# Altium PCB PCB1.PcbDoc
Units mm, origin at the board's own origin, x right, y up, seen from the top; angles counter-clockwise.
Board outline 133.73 x 69.22 mm, 2 copper layers (Top Layer, Bottom Layer); 53 components, 38 nets, 196 pads, 46 vias.
Unrouted connection lines stored in the file: 1.
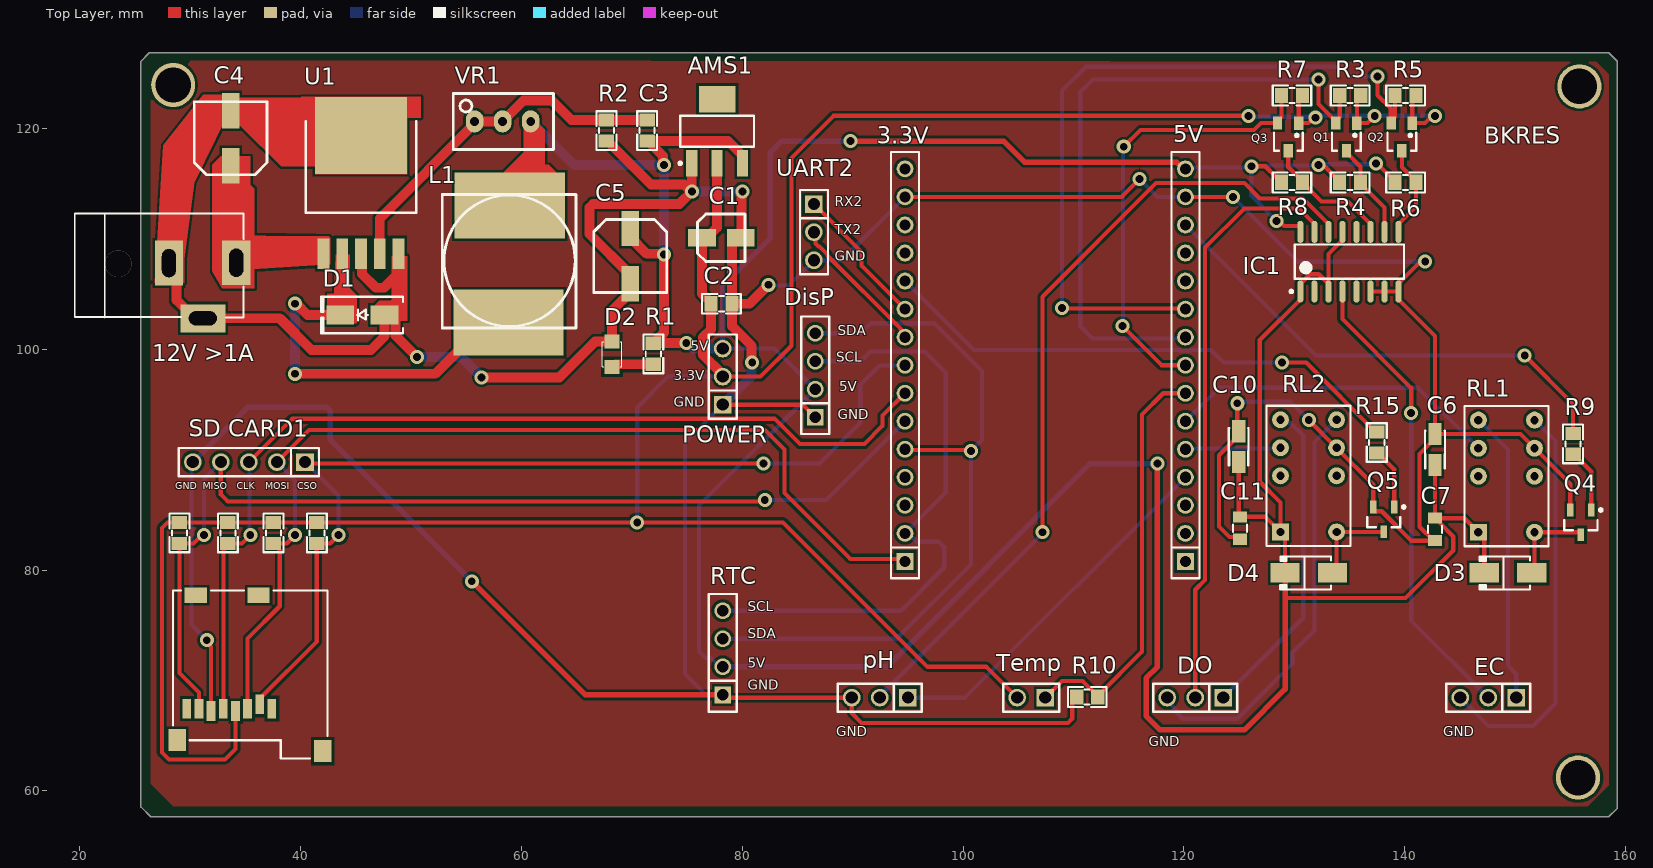
[diagram p0: Top Layer view]
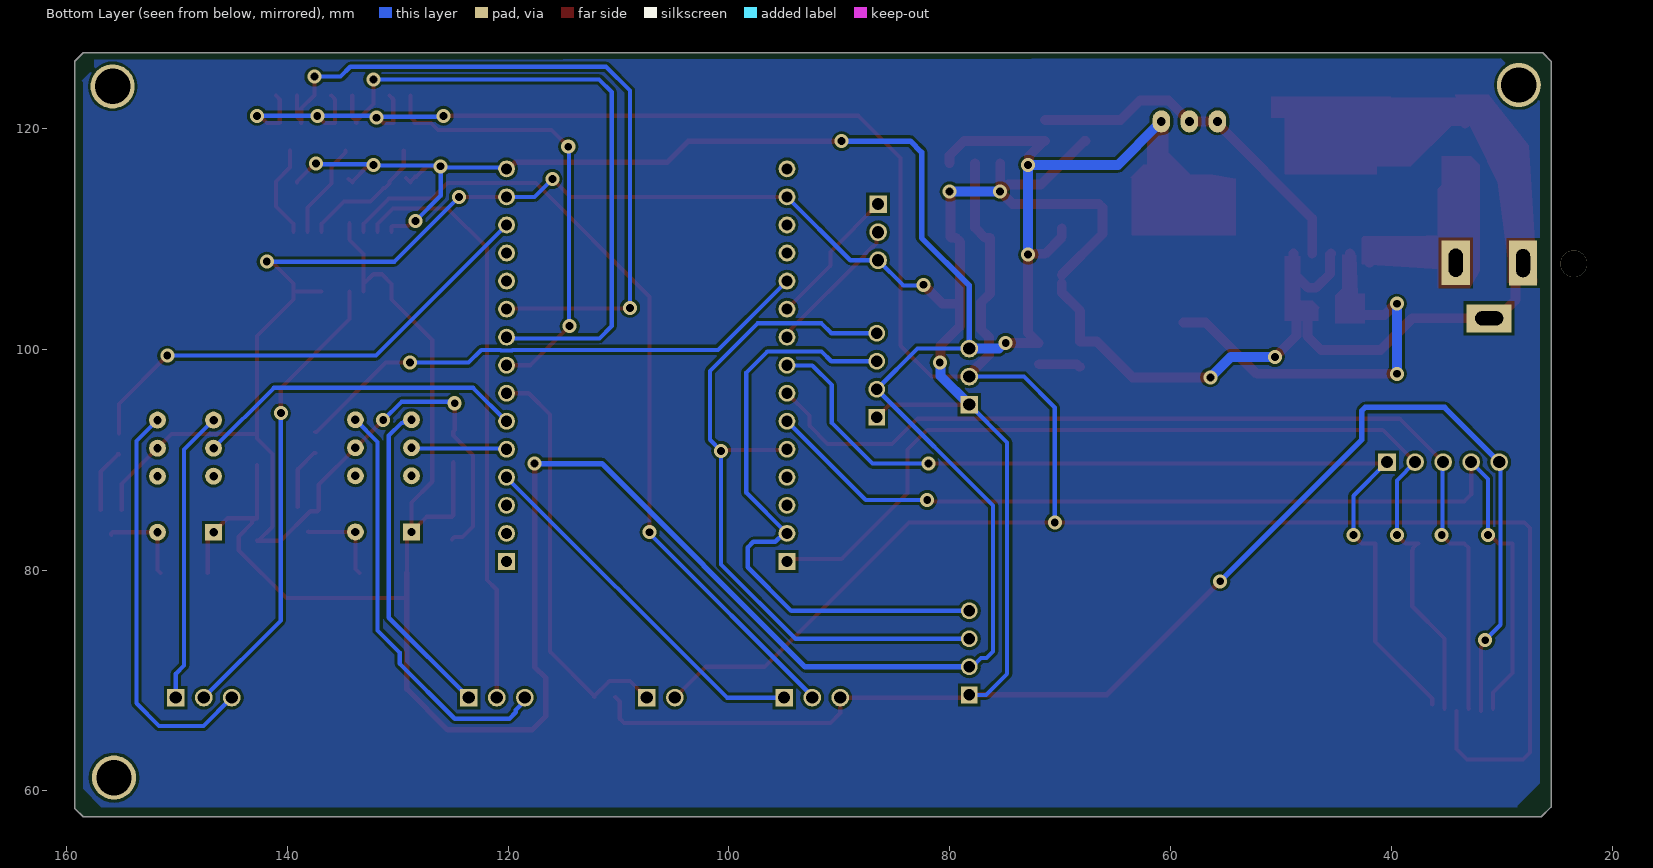
[diagram p1: Bottom Layer view, seen from below]
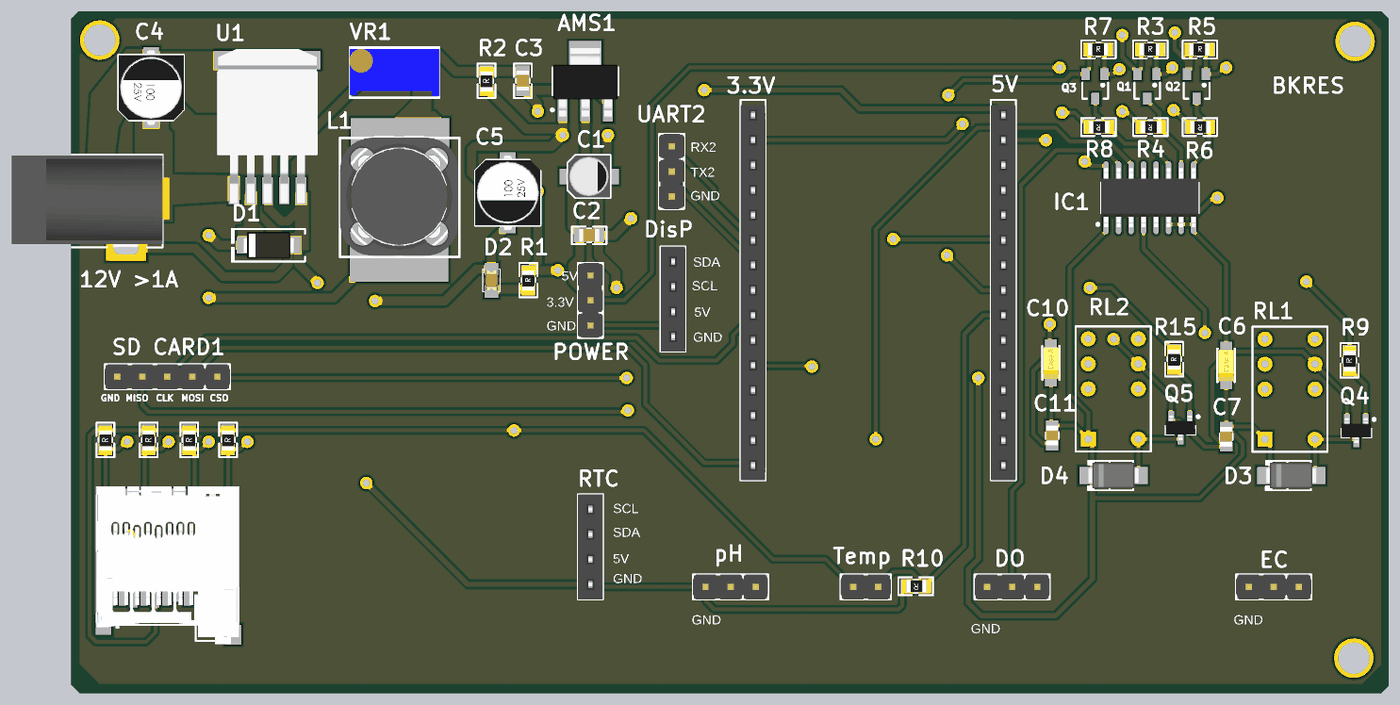
[diagram p2: 3D render of the assembled board from above, using the file's embedded part models]

## Layer stack, top to bottom
Top Solder: solder mask 0.0102, Solder Resist, Dk 3.5
Top Layer: signal copper 0.0356
Dielectric 1: dielectric 0.32, FR-4, Dk 4.8
Bottom Layer: signal copper 0.0356
Bottom Solder: solder mask 0.0102, Solder Resist, Dk 3.5

## Board outline
26.289,126.873 25.527,126.111 25.527,58.547 26.416,57.658 158.496,57.658 159.258,58.42 159.258,126.111 158.496,126.873

## Design rules (kind name [scope] priority, off if disabled: settings)
Clearance [All] p1: gap=0.254 ignorepadtopadclearanceinfootprint=FALSE except(0: Arc-Hole Track-Hole SMDPad-Hole THPad-Hole Via-Hole Fill-Hole Poly-Hole Region-Hole Text-Hole)
PolygonConnect [All] p1: connectstyle=Relief reliefconductorwidth=0.254 reliefentries=4 polygonreliefangle="90 Angle" airgapwidth=0.254
RoutingVias [All] p1: holewidth=0.711 width=1.27 viastyle="Through Hole" minholewidth=0.711 minwidth=1.27 maxholewidth=0.711 maxwidth=1.27
SolderMaskExpansion [All] p1: expansion=0.102 istentingtop=FALSE
Width [All] p1: maxlimit=1 minlimit=0.254 preferedwidth=0.5
30 further rules are at their usual default settings.

## Components (designator, comment, footprint, x,y, rotation, side; value= is the part's Value field where it differs from the comment)
3.3V "JP15" JP15-C1T 94.742,80.793 r90 top (schematic designator C8)
5V "JP15" JP15-C1T 120.142,80.793 r90 top (schematic designator C9)
"12V >1A" "Jac DC" DC-IN 34.163,107.848 r0 top (schematic designator JDC1)
AMS1 "AMS1117-3.3V" SOT223 77.724,119.761 r0 top value="AMS1117-3.3V SOT223"
C1 "1uF" "tu nhom 4 (B)" 78.105,110.109 r0 top
C2 "104" "tu 0805" 78.105,104.14 r0 top
C3 "33pF" "tu 0805" 71.374,119.82 r90 top
C4 "220uF" "tu nhom 6.3 (d)" 33.655,119.126 r90 top
C5 "220uF" "tu nhom 6.3 (d)" 69.85,108.458 r270 top
C6 "C-P" CT1206 142.748,90.932 r90 top value=10u
C7 "C-N" CC0805L 142.748,83.693 r90 top value=100n
C10 "C-P" CT1206 124.968,91.186 r90 top value=10u
C11 "C-N" CC0805L 125.095,83.82 r90 top value=100n
CLK "1k" "tro smd 0805" 33.34,83.374 r90 top (schematic designator R13)
CSO "1k" "tro smd 0805" 41.402,83.374 r90 top (schematic designator R11)
D1 "SS14" "DIODE SMA" 45.593,103.124 r180 top
D2 "LED" LED-0805-Red 68.199,98.425 r90 top
D3 "D Schottky" DO-214AC 149.352,79.756 r180 top
D4 "D Schottky" DO-214AC 131.318,79.756 r180 top
DisP "DisP" "JP 1x4 CT" 86.614,93.853 r90 top (schematic designator JP1)
DO "DO" "JP 1x3 DT" 123.571,68.453 r180 top (schematic designator JP3)
EC "EC" "JP 1x3 DT" 150.114,68.453 r180 top (schematic designator JP2)
GND "MicroSD Card" "MicroSD Card" 42.425,78.154 r180 top (schematic designator CN1)
IC1 "4053" SO16 135.001,107.95 r90 top value=CD4053
L1 "100uH - 3A SMD" "Cuon Cam 12x12x10" 64.928,114.03 r180 top
MISO "1k" "tro smd 0805" 28.956,83.374 r90 top (schematic designator R14)
MOSI "1k" "tro smd 0805" 37.465,83.374 r90 top (schematic designator R12)
pH "pH" "JP 1x3 DT" 94.996,68.453 r180 top (schematic designator pH1)
POWER "SIM_UART" "JP 1x3 DT" 78.232,94.996 r90 top (schematic designator P)
Q1 "DMN2075U-7" SOT23 134.737,119.253 r180 top
Q2 "DMN2075U-7" SOT23 139.755,119.253 r180 top
Q3 "DMN2075U-7" SOT23 129.468,119.253 r180 top
Q4 "C1815" SOT-23 155.956,84.328 r180 top
Q5 "C1815" SOT-23 138.11,84.6 r180 top
R1 "10k" "tro smd 0805" 71.882,99.598 r90 top
R2 "510k" "tro smd 0805" 67.63,119.823 r90 top
R3 "10k" "tro smd 0805" 135.063,123.063 r0 top
R4 "10k" "tro smd 0805" 135.063,115.062 r180 top
R5 "10k" "tro smd 0805" 140.081,123.063 r0 top
R6 "10k" "tro smd 0805" 140.081,115.062 r180 top
R7 "10k" "tro smd 0805" 129.794,123.063 r0 top
R8 "10k" "tro smd 0805" 129.794,115.062 r180 top
R9 "1k" "tro smd 0805" 155.194,91.44 r90 top
R10 "10k" "tro smd 0805" 111.252,68.453 r180 top
R15 "1k" "tro smd 0805" 137.414,91.567 r90 top
RL1 "RL-G6S-2" RL_G6S-2 151.765,83.439 r180 top
RL2 "RL-G6S-2" RL_G6S-2 133.833,83.464 r180 top
RTC "RTC" "JP 1x4 CT" 78.232,68.707 r90 top (schematic designator JP4)
"SD CARD1" "JP 1x5 2.54" "JP 1x5 DT" 40.386,89.789 r180 top
Temp "JP 1x2 2.54" "JP 1x2 DT" 107.442,68.453 r180 top (schematic designator TEMP1)
U1 "LM2596_ADJ" TO263-5 45.466,108.68 r0 top
UART2 "SIM_UART" "JP 1x3 DT" 86.487,113.157 r270 top (schematic designator SIM_UART1)
VR1 "1K" "Bien Tro Vi Chinh Dung" 58.293,120.65 r0 top

## Footprints (in the part's own frame and the unit in brackets; to place one, negate y for a bottom-side part, rotate by r counter-clockwise, add the part's x,y. Pads: shape width x height; smd on the part's side, far side on the other; paste and mask are expansions set on the pad)
"Bien Tro Vi Chinh Dung" [mm] "Bien tro vi chinh"
  oval 1.6x2 hole 0.8: 1(-2.54,0) 2(0,0) 3(2.54,0)
  silkscreen extent -4.47,-2.54 4.6,2.54, body extent -4.54,-2.4 4.66,2.4, height 12.02
CC0805L [mm] "Chip Resistor, Body 2.0x1.3mm, IPC Medium Density"
  rect 1x1.27 smd: 1(-1.016,0) 2(1.016,0)
  silkscreen extent -0.33,-0.64 0.33,0.64, body extent -1,-0.62 1,0.63, height 1
CT1206 [mm] "Capacitor, SM Tantalum; Body 3.2 x 1.6 mm (LxW typ)"
  rect 2x1.2 smd: 1(-1.4,0) 2(1.4,0)
  silkscreen extent -1.7,-0.9 1.7,0.9, body extent -1.6,-0.8 1.6,0.8, height 1.6
"Cuon Cam 12x12x10" [mm] "Cuon Cam 12x12x10"
  rect 10x6 smd: 1(6.1,11.6) 2(6,1)
  silkscreen extent 0,0 12.1,12.1, body extent 0.1,-0.2 12.1,12.14, height 7.51
DC-IN [mil] "Jac DC input"
  rect 100x160 hole 50 slot 100 at 90 deg: 1(0,0) 2(-240,-1)
  rect 160x100 hole 50 slot 100 at 0 deg: 3(-119,-198)
  silkscreen extent -576,-195 26,176, body extent -576,-195 26,173, height 434
"DIODE SMA" [mm] "SMA"
  rect 2.5x1.7 smd: 1(-2,0) 2(2,0)
  silkscreen extent -3.68,-1.65 3.75,1.65, body extent -2.6,-1.37 2.6,1.37, height 2.4
DO-214AC [mm]
  rect 2.65x1.75 smd: 1(-2.15,0) 2(2.15,0)
  silkscreen extent -2,-1.5 2.59,1.5, body extent -2.6,-1.3 2.6,1.3, height 2.4
JP15-C1T [mm] "15 row, straight, gold plating"
  rect 1.52x1.52 hole 1.02: 1(0,0)
  round 1.52 hole 1.02: 2(2.54,0) 3(5.08,0) 4(7.62,0) 5(10.16,0) 6(12.7,0) 7(15.24,0) 8(17.78,0) 9(20.32,0) 10(22.86,0) 11(25.4,0) 12(27.94,0) 13(30.48,0) 14(33.02,0) 15(35.56,0)
  silkscreen extent -1.52,-1.27 37.08,1.27, body extent -1.52,-1.25 36.58,1.25, height 8.51
"JP 1x2 DT" [mm] "2 pins, 1 row, straight, gold plating"
  rect 1.6x1.6 hole 1.1: 1(0,0)
  round 1.6 hole 1.1: 2(2.54,0)
  silkscreen extent -1.27,-1.27 3.81,1.27, body extent -1.27,-1.27 3.81,1.27, height 8.54
"JP 1x3 DT" [mm]
  rect 1.6x1.6 hole 1.1: 1(0,0)
  round 1.6 hole 1.1: 2(2.54,0) 3(5.08,0)
  silkscreen extent -1.27,-1.27 6.35,1.27, body extent -1.27,-1.27 6.35,1.27, height 8.54
"JP 1x4 CT" [mm]
  rect 1.52x1.52 hole 1.02: 1(0,0)
  round 1.52 hole 1.02: 2(2.54,0) 3(5.08,0) 4(7.62,0)
  silkscreen extent -1.52,-1.27 9.14,1.27, body extent -1.52,-1.25 9.14,1.25, height 8.51
"JP 1x5 DT" [mm] "5 pins, 1 row, straight, gold plating"
  rect 1.6x1.6 hole 1.1: 1(0,0)
  round 1.6 hole 1.1: 2(2.54,0) 3(5.08,0) 4(7.62,0) 5(10.16,0)
  silkscreen extent -1.27,-1.27 11.43,1.27, body extent -1.27,-1.27 11.43,1.27, height 8.54
LED-0805-Red [mil]
  rect 50x55 smd: 1(0,0) 2(90,0)
  silkscreen extent 0,-35 90,35, body extent 5,-25 85,25, height 43
"MicroSD Card" [mm] "Connector; SD Card Type A, SM, 9 Position, Right Angle, Pitch 2.5 mm, Body 23.3 x 27.4 x 3.4 mm (LxWxH)"
  rect 0.8x1.8 smd: 1(5.04,10.7) 2(6.14,10.3) 3(7.24,10.7) 4(8.34,10.9) 5(9.44,10.7) 6(10.54,10.9) 7(11.64,10.7) 8(12.74,10.7)
  rect 1.6x2 smd: MH1(0.43,14.55) MH2(13.6,13.55)
  rect 2x1.4 smd: MH3(11.93,0.43) MH4(6.23,0.43)
  silkscreen extent 0,0 13.98,15.2, body extent -0.21,-0.49 14.39,15.51, height 1.72
RL_G6S-2 [mil]
  rect 60x60 hole 30: 1(200,0)
  round 60 hole 30: 3(200,-200) 4(200,-300) 5(200,-400) 8(0,-400) 9(0,-300) 10(0,-200) 12(0,0)
  silkscreen extent -50,-450 250,50
SO16 [mm] "SOIC, 16-Leads, Body 9.90x3.91mm, Pitch 1.27mm, IPC Medium Density"
  oval 2x0.55 smd: 1(-2.7,4.445) 2(-2.7,3.175) 3(-2.7,1.905) 4(-2.7,0.635) 5(-2.7,-0.635) 6(-2.7,-1.905) 7(-2.7,-3.175) 8(-2.7,-4.445) 9(2.7,-4.445) 10(2.7,-3.175) 11(2.7,-1.905) 12(2.7,-0.635) 13(2.7,0.635) 14(2.7,1.905) 15(2.7,3.175) 16(2.7,4.445)
  silkscreen extent -2.82,-4.95 1.55,5.39, body extent -3,-4.95 3,4.95, height 1.4
SOT23 [mm] "SOT 23 _ 1-3-2"
  rect 0.85x1.2 smd: 1(-0.94,-1.245) 2(0.985,-1.25) 3(0.005,1.25)
  silkscreen extent -1.29,-0.38 1.31,1.25, body extent -1.5,-1.5 1.52,1.5, height 1.27
SOT223 [mm]
  rect 1x2.4 smd: 1(-2.3,-2.9) 2(0,-2.9) 3(2.3,-2.9)
  rect 3.3x2.4 smd: 4(0,2.9)
  silkscreen extent -3.47,-3.02 3.35,1.4, body extent -3.25,-3.56 3.25,3.4, height 1.68
SOT-23 [mm] "SOT-23; 3 Leads; Body 3.1 x 2.5 mm, inc. leads (LxW max)"
  rect 0.6x1.15 smd: 1(-0.95,-1.125) 2(0.95,-1.125) 3(0,1.125)
  silkscreen extent -1.93,-1.25 1.5,0.7, body extent -1.5,-1.25 1.5,1.25, height 1.06
TO263-5 [mm] "LM2576-SMD"
  rect 1.07x2.75 smd: 1(-3.4,0) 2(-1.7,0) 3(0,0) 4(1.7,0) 5(3.4,0)
  rect 8.33x6.99 smd: 6(0,10.7)
  Top Layer region: -5.4,14.195 -5.4,12.295 -4.165,12.295 -4.165,7.205 4.165,7.205 4.165,12.295 5.4,12.295 5.4,14.195
  silkscreen extent -5,3.7 5,12, body extent -5,-1.29 5,14.38, height 4.79
"tro smd 0805" [mm]
  rect 1.2x1.4 smd: 1(-0.946,-0.061) 2(0.954,-0.061)
  silkscreen extent -1.75,-0.97 1.75,0.84, body extent -1.56,-0.76 1.44,0.64, height 0.53
"tu 0805" [mm] "Compoment SMD 80x50mil"
  rect 1.2x1.4 smd: 1(-0.946,-0.003) 2(0.954,-0.003)
  silkscreen extent -1.75,-0.89 1.75,0.89, body extent -1.01,-0.64 1.01,0.63, height 0.61
"tu nhom 4 (B)" [mm]
  rect 2.5x1.6 smd: 1(-1.75,0) 2(1.75,0)
  silkscreen extent -2.15,-2.15 2.15,2.15, body extent -2.31,-2.15 2.29,2.15, height 3.91
"tu nhom 6.3 (d)" [mm]
  rect 3.2x1.6 smd: 1(-2.5,0) 2(2.5,0)
  silkscreen extent -3.3,-3.3 3.3,3.3, body extent -3.8,-3.3 3.8,3.3, height 8

## Part data
3.3V 5V: "WR-PHD 2.54 mm Angled Socket Header", Manufacturer="W¨¹rth Elektronik eiSos GmbH", partNo=613015143121, ComponentLink1 Description=Manufacturer, ComponentLink1URL=http://www.we-online.com, ComponentLink2 Description=Datasheet, ComponentLink2URL=http://katalog.we-online.de/em/datasheet/6130xx143121.pdf, Created by="Karrer Zheng", Created Date="29 March 2013", NoPins=15
"12V >1A": library part DCIN, "Jac DC input"
AMS1: library part "AMS1117 SMD", "Dán", Chung_Loai=Dán, Don_Vi=Con, Ma_Hang=MH000596
C1: library part "Tu Nhom 1uF 50V", "Dán", Chung_Loai=Dán, Don_Vi=Con, Ma_Hang=MH007467, So_Chan=2, Ten_Linh_Kien="Tụ Nhôm 1uF 50V 4x5.4MM"
C2: library part "Tu 0805 104 50V 10%", "Dán", Chung_Loai=Dán, Don_Vi=Con, Ma_Hang=MH004551, So_Chan=2, Ten_Linh_Kien="Tụ 0805 104-100nF 10% 50V"
C3: library part "Tu 0805 33pF 50V 10%", "Dán", Chung_Loai=Dán, Don_Vi=Con, Ma_Hang=MH004563, So_Chan=2, Ten_Linh_Kien="Tụ 0805 33p 10% 50V"
C4 C5: library part "Tu Nhom 220uF 16V", "Dán", Chung_Loai=Dán, Don_Vi=Con, Ma_Hang=MH002227, So_Chan=2, Ten_Linh_Kien="Tụ Nhôm 220uF 16V 6.3x7.7MM"
C6 C10: "Polar Capacitor"
C7 C11: "Non-Polar Capacitor"
CLK CSO MISO MOSI R3 R4 R5 R6 R7 R8 R9 R15: library part "Tro 0805 1% 1k", "Dán", Chung_Loai=Dán, Don_Vi=Con, Ma_Hang=MH005468, So_Chan=2, Ten_Linh_Kien="Trở 0805 1% 1k"
D1: library part "Diode SS14 ( 1N5819)", "Dán", Chung_Loai=Dán, Don_Vi=Con, Ma_Hang=MH002211, Ten_Linh_Kien="Diode SS14 DO214 Schottky 1A 40V ( 1N5819 DO214)"
D2: "Typical INFRARED GaAs LED", LatestRevisionDate=08-Jul-2005, LatestRevisionNote="Mech Layer 1 removed.", PackageReference=LED-0, Published=8-Jun-2000, Publisher="Altium Limited"
D3 D4: "Schottky Diode"
DisP RTC: library part "JP 1x4 2.54 Cai Thang", "Cắm", Chung_Loai=Cắm, Don_Vi=Con, Ma_Hang=MH004006, Ten_Linh_Kien="Jump Đơn Cái 2.54MM 1x20P Thẳng"
DO EC pH POWER UART2: library part "JP 1x3 2.54 Duc Thang", "Cắm", Chung_Loai=Cắm, Don_Vi=Con, Ma_Hang=MH000903, Ten_Linh_Kien="Jump Đơn Đực 2.54MM 1x40P Thẳng 11MM"
IC1: "Dual 4-channel analogue  multiplexer/demultiplexer"
L1: library part "CUON CAM 100uH SMD", "Dán", Chung_Loai=Dán, Don_Vi=Con, Ten_Linh_Kien="Cuộn Cảm 100uH 7x7x4MM CD74"
Q1 Q2 Q3: "MOSFET N-CH 20V 4.2A SOT23", LatestRevisionDate=17-Jul-2002, LatestRevisionNote="Re-released for DXP Platform.", PackageReference=E3, PackageVersion=1995/1996, Published=8-Jun-2000, Publisher="Altium Limited"
Q4 Q5: library part QC1815, "NPN G, 150mA, 150MHz"
R1 R10: library part "Tro 0805 1% 10k", "Dán", Chung_Loai=Dán, Don_Vi=Con, Ma_Hang=MH005473, So_Chan=2, Ten_Linh_Kien="Trở 0805 1% 10k"
R2: library part "Tro 0805 1% 510k", "Dán", Chung_Loai=Dán, Don_Vi=Con, Ma_Hang=MH005486, So_Chan=2, Ten_Linh_Kien="Trở 0805 1% 510k"
"SD CARD1": library part "JP 1x5 2.54 Duc Thang", "Cắm", Chung_Loai=Cắm, Don_Vi=Con, Ma_Hang=MH000903, Ten_Linh_Kien="Jump Đơn Đực 2.54MM 1x40P Thẳng 11MM"
Temp: library part "JP 1x2 2.54 Duc Thang", "Cắm", Chung_Loai=Cắm, Don_Vi=Con, Ma_Hang=MH000903, Ten_Linh_Kien="Jump Đơn Đực 2.54MM 1x40P Thẳng 11MM"
VR1: library part "Bien Tro Tinh Chinh 1K Dung", "Cắm", Chung_Loai=Cắm, Don_Vi=Con, Ma_Hang=MH003234, Ten_Linh_Kien="Biến Trở VR 102-1K 3296W"

## Free pads (board coordinates)
  round 4 hole 3.2: 3(28.448,123.952) 3(155.702,61.214) 3(155.829,123.825)

## Via types
v1: diameter 1.27, hole 0.711, Top Layer to Bottom Layer, 45 vias
v2: diameter 2.4, hole 2.4, Top Layer to Bottom Layer, 1 vias

## Nets (pads, with @x,y where several pads share a name; then routed paths per layer and width w, separated by ;. In a path a pad name is that pad's centre, name@x,y a point inside that pad or via, vN(x,y) a via of type N, cw(c..) or ccw(c..) an arc to the next point about the centre after c; other vN are vias at no path point)
3.3V: AMS1.2 AMS1.4 C1.1 C2.1 CLK.2 CSO.2 GND.4 MISO.2 MOSI.2 POWER.2 Q1.1 Q2.1 Q3.1 R3.2 R5.2 R7.2 Temp.2 | length 254.4
  Top Layer w0.381: GND.4 34.085,63.803 33.147,62.865 28.067,62.865 27.432,63.5 27.432,83.82 27.94,84.328 MISO.2 CLK.2 MOSI.2 CSO.2 v1(70.485,84.328) 83.693,84.328 96.774,71.247 102.108,71.247 Temp.2 ; POWER.2 81.661,97.536 84.455,100.33 84.455,117.348 88.265,121.158 v1(125.857,121.158) ; R7.2 130.408,122.662 Q3.1 131.278,120.498 131.771,120.99 v1(131.912,120.99) ; R3.2 135.676,122.662 Q1.1 136.627,120.498 v1(137.287,121.158) ; R5.2 140.695,122.662 Q2.1 141.847,120.498 142.507,121.158 v1(142.748,121.158)
  Top Layer w0.889: AMS1.2 77.724,111.028 76.805,110.109 C1.1 76.355,105.041 77.159,104.237 C2.1 77.159,101.809 76.454,101.103 76.454,99.506 78.232,97.728 POWER.2
  Bottom Layer w0.381: v1(70.485,84.328) 70.485,94.742 73.279,97.536 POWER.2 ; v1(125.857,121.158) 125.941,121.074 131.828,121.074 v1(131.912,120.99) ; v1@131.912,121.158 132.08,121.158 v1(137.287,121.158) v1(142.748,121.158)
5V: 5V.15 AMS1.3 C3.1 C5.1 C6.1 C7.2 C10.1 C11.2 D3.2 D4.2 DisP.2 IC1.1 IC1.3 IC1.13 IC1.16 L1.2 POWER.3 R1.2 R4.2 R6.2 R8.2 RL1.1 RL2.1 RTC.2 VR1.3 | length 373.6
  Top Layer w0.381: C10.1 124.968,84.963 C11.2 127.381,84.836 RL2.1 ; v1(126.111,116.586) 127.376,116.586 128.33,115.632 128.43,115.632 128.84,115.223 R8.2 R8.2@129.249,115.532 ; v1(128.397,111.633) 128.638,111.633 129.086,111.184 130.478,111.184 130.556,111.106 IC1.16 ; 129.168,77.47 140.081,77.47 144.399,81.788 144.399,83.058 143.192,84.265 143.192,84.399 C7.2@142.883,84.709 ; D4.2 129.168,83.049 RL2.1 ; v1(132.207,116.713) 132.377,116.543 132.788,116.543 134.108,115.223 R4.2 R4.2@134.433,115.447 ; IC1.3 IC1.3@133.096,105.929 ; IC1.13@134.366,111.421 IC1.13 134.366,109.925 133.096,108.655 IC1.3@133.096,105.929 ; v1(137.414,116.84) 137.509,116.84 139.127,115.223 R6.2 ; C6.1 C7.2 C7.2@142.883,84.709 ; D3.2 147.202,82.922 RL1.1 145.415,84.709 C7.2@142.883,84.709 ; RL2.1 128.753,86.131 126.873,88.011 126.873,100.842 130.556,104.525 130.556,105.929 131.434,106.807 132.218,106.807 IC1.3@133.096,105.929
  Top Layer w0.5: v1(89.789,118.872) 103.672,118.872 105.577,116.967 119.339,116.967 119.953,116.353 5V.15 ; v1(117.602,89.662) 117.602,71.247 116.586,70.231 116.586,66.802 117.856,65.532 125.476,65.532 129.168,69.224 129.168,77.47 D4.2
  Top Layer w0.889: L1.2 60.833,114.935 VR1.3 ; C5.1 69.85,110.158 71.35,108.658 72.825,108.658 v1(72.898,108.585) 72.898,101.507 72.198,100.808 72.198,100.708 R1.2@72.059,100.568 ; C3.1 C3.1@71.477,118.874 ; R1.2 71.959,100.568 R1.2@72.059,100.568 ; v1(72.898,116.713) 72.825,116.786 72.825,117.527 C3.1@71.477,118.874 ; v1(74.93,100.584) 74.914,100.568 R1.2@72.059,100.568 ; AMS1.3 80.024,117.561 78.711,118.874 C3.1@71.477,118.874
  Bottom Layer w0.381: RTC.2 77.964,71.247 77.156,72.054 76.663,72.054 76.073,72.644 76.073,85.852 DisP.2 82.931,100.076 POWER.3 ; 5V.15 120.258,116.47 125.995,116.47 v1(126.111,116.586) ; v1(128.397,111.633) 126.111,113.919 v1(126.111,116.586) ; v1(137.414,116.84) 137.35,116.776 132.27,116.776 v1(132.207,116.713) 132.143,116.649 126.174,116.649 v1(126.111,116.586)
  Bottom Layer w0.5: RTC.2 93.091,71.247 111.506,89.662 v1(117.602,89.662) ; POWER.3 78.232,105.791 82.55,110.109 82.55,117.856 83.566,118.872 v1(89.789,118.872)
  Bottom Layer w0.889: VR1.3 60.833,120.642 61.161,120.314 61.169,120.314 64.77,116.713 v1(72.898,116.713) v1(72.898,108.585) ; 75.541,100.076 POWER.3
CLK: 3.3V.7 "SD CARD1.3" CLK.1 GND.5 | length 88.6
  Top Layer w0.381: GND.5 33.02,67.489 33.02,82.047 CLK.1 34.673,82.428 35.429,83.185 v1(35.433,83.185) ; 35.306,89.789 39.243,93.726 82.931,93.726 85.217,91.44 91.059,91.44 92.71,93.091 92.71,94.001 3.3V.7
  Bottom Layer w0.381: 35.306,89.789 35.369,89.725 35.369,83.248 v1(35.433,83.185)
CSO: 3.3V.8 "SD CARD1.1" CSO.1 GND.2 | length 87
  Top Layer w0.381: GND.2 36.285,68.354 41.463,73.532 CSO.1 42.677,82.428 v1(43.434,83.185) ; 40.386,89.789 40.513,89.662 v1(81.915,89.662)
  Bottom Layer w0.381: 40.386,89.789 43.434,86.741 v1(43.434,83.185) ; v1(81.915,89.662) 86.995,89.662 90.678,93.345 90.678,96.774 92.45,98.546 94.715,98.546 3.3V.8
DC_IN: "12V >1A.1" C4.1 U1.1 | length 1.6
  Top Layer w0.889: C4.1 C4.1@33.909,116.372 ; 33.909,108.102 34.163,107.848 ; U1.1@41.976,107.848 42.066,107.939 U1.1
DO_ADC: 5V.5 RL2.4 | length 8.7
  Bottom Layer w0.381: 5V.5 120.208,91.019 128.687,91.019 RL2.4
DO_IN: 3.3V.11 R15.2 | length 48.4
  Top Layer w0.381: v1(128.905,98.806) 131.09,98.806 137.375,92.521 R15.2
  Bottom Layer w0.381: 3.3V.11 100.986,99.949 119.603,99.949 119.643,99.908 120.641,99.908 120.681,99.949 122.435,99.949 123.578,98.806 v1(128.905,98.806)
DO_ON: 5V.9 Q1.2 R3.1 | length 60.4
  Top Layer w0.381: v1(132.207,124.46) 132.207,122.222 Q1.2@133.751,120.678 ; Q1.2 Q1.2@133.751,120.678 ; R3.1 134.117,121.044 Q1.2@133.751,120.678
  Bottom Layer w0.381: 5V.9 120.025,100.996 111.729,100.996 110.617,102.108 110.617,123.317 111.76,124.46 v1(132.207,124.46)
DO_ON_5V: IC1.10 Q1.3 R4.1 | length 8.8
  Top Layer w0.381: Q1.3 134.731,117.828 136.008,116.551 R4.1 136.008,115.023 138.176,112.855 IC1.10
DO_POW: DO.2 IC1.15 | length 53.8
  Top Layer w0.381: DO.2 121.031,78.232 121.92,79.121 121.92,109.22 125.476,112.776 130.422,112.776 131.826,111.372 IC1.15
EC_ADC: 5V.6 RL1.4 | length 30.1
  Bottom Layer w0.381: 5V.6 123.169,96.52 141.224,96.52 RL1.4
EC_IN: 5V.13 R9.2 | length 44.5
  Top Layer w0.381: v1(150.876,99.441) 155.255,95.062 R9.2
  Bottom Layer w0.381: 5V.13 131.974,99.441 v1(150.876,99.441)
EC_ON: 5V.10 Q2.2 R5.1 | length 68.1
  Top Layer w0.381: v1(108.966,103.759) 109.019,103.706 120.089,103.706 5V.10 ; v1(137.541,124.714) 137.541,123.018 138.748,121.811 138.748,120.525 Q2.2 138.77,120.678 139.135,121.044 R5.1
  Bottom Layer w0.381: v1(108.966,103.759) 108.966,123.444 111.125,125.603 134.299,125.603 135.188,124.714 v1(137.541,124.714)
EC_ON_5V: IC1.9 Q2.3 R6.1 | length 8.5
  Top Layer w0.381: IC1.9 139.446,111.375 141.027,112.956 R6.1 141.027,115.223 139.75,116.5 Q2.3
EC_POW: EC.2 IC1.4 | length 42.3
  Top Layer w0.381: IC1.4 134.366,102.743 140.589,96.52 v1(140.589,94.234)
  Bottom Layer w0.381: v1(140.589,94.234) 140.589,75.438 EC.2
GND: 3.3V.14 5V.14 "12V >1A.2" "12V >1A.3" "SD CARD1.5" AMS1.1 C1.2 C2.2 C4.2 C5.2 C6.2 C7.1 C10.2 C11.1 D1.1 D2.2 DisP.1 GND.6 IC1.6 IC1.7 IC1.8 pH.3 POWER.1 Q4.2 Q5.2 R2.1 R10.2 RL1.9 RL2.9 RTC.1 U1.3 U1.5 UART2.3 | length 446.8
  Top Layer w0.381: v1(31.496,73.66) 31.496,73.419 31.885,73.03 GND.6 ; POWER.1@77.851,95.377 POWER.1 85.471,94.996 DisP.1 ; RTC.1 78.486,68.453 pH.3 89.916,67.056 90.805,66.167 109.505,66.167 109.888,66.55 109.888,68.104 R10.2 ; 3.3V.14 114.365,113.813 v1(115.989,115.438) ; 5V.14 120.153,113.803 124.449,113.803 v1(124.46,113.792) ; v1(124.841,95.123) 124.841,92.713 C10.2 124.968,92.186 123.19,90.408 123.19,83.947 124.123,83.014 124.885,83.014 C11.1 ; v1(131.318,93.599) RL2.9 137.16,87.757 137.16,85.45 137.269,85.34 137.926,85.34 140.589,82.677 C7.1@142.613,82.677 ; IC1.6 IC1.7 IC1.8 ; v1(141.859,107.95) 141.689,107.78 141.251,107.78 139.446,105.975 IC1.8 ; C7.1 C7.1@142.613,82.677 ; Q4.2 155.006,87.818 150.495,92.329 142.751,92.329 C6.2 ; IC1.8 139.446,104.525 142.748,101.223 C6.2 ; C7.1@142.613,82.677 141.351,83.939 141.351,90.535 142.748,91.932 C6.2
  Top Layer w0.5: D1.1 47.993,103.124 D1.1@48.593,102.524 ; v1(55.499,78.994) 65.786,68.707 RTC.1 ; 66.167,112.864 66.46,113.157 ; C5.2 C5.2@69.85,106.758
  Top Layer w0.889: 28.321,108.077 28.067,107.823 28.74,107.15 28.74,104.457 30.378,102.819 31.14,102.819 38.106,102.819 40.977,99.949 46.355,99.949 47.593,101.187 D1.1 ; C4.2@33.299,120.47 33.655,120.826 C4.2 ; U1.3 45.557,108.59 45.557,106.843 46.812,105.588 47.549,105.588 48.775,106.814 ; D1.1@47.993,103.124 48.866,103.997 U1.5 ; R2.1 67.791,118.877 71.733,114.935 74.727,114.935 75.362,114.3 v1(75.438,114.3) 75.431,114.307 75.431,116.854 AMS1.1 ; D2.2 68.199,103.507 69.85,105.158 C5.2 ; v1(80.01,114.3) 79.937,114.227 79.937,110.191 C1.2 79.415,110.109 79.059,109.753 C2.2 ; v1(80.899,98.806) 80.826,98.879 80.826,100.336 79.059,102.103 C2.2 ; v1(82.359,105.855) 80.642,104.137 C2.2
  Top Layer w0.899: D1.1@48.593,102.524 48.593,101.267 v1(50.546,99.314) ; v1(56.387,97.471) 63.435,97.471 66.675,100.711 D2.2 ; 66.167,112.864 66.167,110.441 C5.2@69.85,106.758 ; 66.46,113.157 74.295,113.157 v1(75.438,114.3)
  Bottom Layer w0.381: 30.226,89.789 30.099,89.662 30.099,75.057 v1(31.496,73.66) ; RTC.1 76.708,68.707 74.803,70.612 74.803,91.567 POWER.1 ; v1(82.359,105.855) 82.423,105.791 84.201,105.791 UART2.3 89.006,108.077 3.3V.14 ; v1(115.989,115.438) 117.614,113.813 5V.14 ; v1(124.46,113.792) 130.302,107.95 v1(141.859,107.95) ; v1(124.841,95.123) 124.968,95.25 129.667,95.25 v1(131.318,93.599)
  Bottom Layer w0.5: 30.226,89.789 35.179,94.742 42.379,94.742 42.672,94.449 42.672,91.821 v1(55.499,78.994)
  Bottom Layer w0.889: v1(75.438,114.3) v1(80.01,114.3) ; POWER.1 80.826,97.59 80.826,98.733 v1(80.899,98.806)
  Bottom Layer w0.899: v1(50.546,99.314) 54.544,99.314 v1(56.387,97.471)
MISO: 3.3V.6 "SD CARD1.4" GND.7 MISO.1 | length 93.6
  Top Layer w0.381: GND.7 30.785,68.91 29.017,70.678 MISO.1 30.293,82.428 31.05,83.185 v1(31.242,83.185) ; 32.766,89.789 32.766,86.868 33.401,86.233 81.915,86.233 v1(82.042,86.36)
  Bottom Layer w0.381: v1(31.242,83.185) 31.242,88.265 32.766,89.789 ; v1(82.042,86.36) 87.609,86.36 3.3V.6
MOSI: 3.3V.1 "SD CARD1.2" GND.3 MOSI.1 | length 91.4
  Top Layer w0.381: GND.3 35.185,73.816 38.1,76.731 38.1,81.795 38.035,81.86 38.035,82.018 37.626,82.428 MOSI.1 38.74,82.428 v1(39.497,83.185) ; 37.846,89.789 40.767,92.71 82.042,92.71 83.82,90.932 83.82,86.995 89.789,81.026 94.509,81.026 3.3V.1
  Bottom Layer w0.381: 37.846,89.789 39.497,88.138 v1(39.497,83.185)
NetC3_2: C3.2 R2.2 U1.4 VR1.1 VR1.2 | length 32.7
  Top Layer w0.889: U1.4 47.166,111.863 55.753,120.45 VR1.1 VR1.2 58.293,120.658 60.19,122.555 62.759,122.555 64.537,120.777 R2.2 67.692,120.776 C3.2 C3.2
NetD1_2: D1.2 L1.1 U1.2 | length 32.4
  Top Layer w0.889: v1(39.497,97.79) 52.188,97.79 56.828,102.43 L1.1 ; v1(39.497,104.14) 39.6,104.14 40.616,103.124 D1.2 D1.2@43.68,103.211 ; U1.2@43.68,108.594 U1.2
  Bottom Layer w0.889: v1(39.497,97.79) v1(39.497,104.14)
NetD2_1: D2.1 R1.1 | length 3.8
  Top Layer w0.889: D2.1 68.263,98.425 68.49,98.652 R1.1
NetD3_1: D3.1 Q4.3 RL1.12 | length 8.2
  Top Layer w0.381: D3.1 151.765,80.019 RL1.12 155.847,83.439 155.956,83.33 Q4.3
NetD4_1: D4.1 Q5.3 RL2.12 | length 8.1
  Top Layer w0.381: D4.1 133.833,80.121 RL2.12 138.099,83.464 Q5.3
NetJP2_1: EC.1 RL1.5 | length 26.6
  Bottom Layer w0.381: RL1.5 149.352,90.932 149.352,71.374 150.114,70.612 EC.1
NetJP2_3: EC.3 RL1.8 | length 37
  Bottom Layer w0.381: EC.3 147.589,65.898 151.623,65.898 153.67,67.945 153.67,91.694 RL1.8
NetJP3_1: DO.1 RL2.5 | length 29.4
  Bottom Layer w0.381: DO.1 130.81,75.692 130.81,92.202 129.667,93.345 129.547,93.345 129.487,93.406 128.971,93.406 RL2.5
NetJP3_3: DO.3 RL2.8 | length 38.2
  Bottom Layer w0.381: DO.3 118.491,68.144 119.306,67.329 119.306,67.13 119.888,66.548 124.841,66.548 129.826,71.533 129.826,72.549 131.826,74.549 131.826,91.618 RL2.8
NetQ4_3: Q4.1 R9.1 | length 5.8
  Top Layer w0.381: R9.1 155.355,90.494 156.906,88.943 Q4.1
NetQ5_3: Q5.1 R15.1 | length 5.6
  Top Layer w0.381: R15.1 137.575,90.621 139.06,89.136 Q5.1
pH_ADC: 5V.4 pH.1 | length 33.4
  Bottom Layer w0.381: pH.1 100.182,68.453 5V.4
pH_ON: 5V.8 Q3.2 R7.1 | length 41
  Top Layer w0.381: v1(114.427,102.108) 117.962,98.573 5V.8 ; v1(114.554,118.364) 116.078,119.888 126.364,119.888 126.979,120.503 Q3.2 128.483,120.678 128.848,121.044 R7.1
  Bottom Layer w0.381: v1(114.427,102.108) 114.49,102.171 114.49,118.3 v1(114.554,118.364)
pH_ON_5V: IC1.11 Q3.3 R8.1 | length 11.9
  Top Layer w0.381: Q3.3 129.463,116.5 130.74,115.223 130.74,115.023 131.149,114.613 131.259,114.613 132.461,113.411 134.87,113.411 136.906,111.375 IC1.11
pH_POW: IC1.14 pH.2 | length 74.8
  Top Layer w0.381: v1(107.188,83.439) 107.188,104.775 117.475,115.062 125.476,115.062 126.873,113.665 130.806,113.665 133.096,111.375 IC1.14
  Bottom Layer w0.381: pH.2 92.456,68.58 107.188,83.312 v1(107.188,83.439)
RX2: 3.3V.10 UART2.1 | length 12.9
  Top Layer w0.381: UART2.1 90.81,108.834 90.81,107.585 3.3V.10
SCL: 3.3V.2 DisP.3 RTC.4 | length 56.7
  Bottom Layer w0.381: RTC.4 94.361,76.327 98.298,80.264 98.298,82.073 97.795,82.576 95.807,82.576 95.05,83.333 3.3V.2 98.425,87.016 98.425,97.917 96.52,99.822 91.621,99.822 90.732,98.933 DisP.3
SDA: 3.3V.5 DisP.4 RTC.3 | length 66.5
  Top Layer w0.381: 3.3V.5 94.816,90.879 100.637,90.879 v1(100.711,90.805)
  Bottom Layer w0.381: RTC.3 93.98,73.787 100.711,80.518 v1(100.711,90.805) 101.727,91.821 101.727,98.044 97.409,102.362 91.621,102.362 90.732,101.473 DisP.4
Temp_ADC: 5V.7 R10.1 Temp.1 | length 37.9
  Top Layer w0.381: Temp.1 108.966,69.977 110.834,69.977 R10.1@112.198,68.614 ; R10.1 R10.1@112.198,68.614 ; 5V.7 118.131,96.033 116.205,94.107 116.205,72.621 R10.1@112.198,68.614
TX2: 3.3V.9 UART2.2 | length 13
  Top Layer w0.381: UART2.2 86.631,110.473 86.631,109.584 86.894,109.322 87.002,109.322 87.732,108.592 87.732,108.484 94.361,101.854 94.361,101.802 94.742,101.421 3.3V.9
pads on no net: 3.3V.3 3.3V.4 3.3V.12 3.3V.13 3.3V.15 5V.1 5V.2 5V.3 5V.11 5V.12 GND.1 GND.8 GND.MH1 GND.MH2 GND.MH3 GND.MH4 IC1.2 IC1.5 IC1.12 RL1.3 RL1.10 RL2.3 RL2.10 U1.6
copper on no net:
  other v2: 23.47,107.747

## Polygon pours and split planes (outlines as drawn)
no net on Bottom Layer "NONET_L02_P001" (solid, pour order 1): 30.099,126.365 26.543,122.809 26.543,60.706 28.575,58.674 28.575,58.547 156.845,58.547 158.496,60.198 158.496,124.206 158.623,124.333 157.48,125.476 157.48,126.238
no net on Top Layer "NONET_L01_P000" (solid, pour order 0): 30.099,126.174 26.416,122.492 26.416,60.642 28.448,58.61 156.591,58.61 158.496,60.515 158.496,124.904 157.353,126.047

## Other copper
Top Layer:
  region net 5V: 54.102,115.443 54.102,110.363 63.5,110.363 63.5,115.443 63.627,115.57 62.484,116.713 62.103,116.713 62.103,119.888 61.341,120.65 61.214,120.523 60.198,120.523 60.198,117.856 58.166,115.824 56.134,115.824
  region net GND: 49.657,102.616 46.609,102.616 46.609,103.632 46.482,103.759 47.117,104.394 48.133,104.394 48.26,104.521 48.26,108.458 49.657,108.458
  region net NetD1_2: 43.18,108.585 44.45,108.585 44.45,105.537 45.085,104.902 45.085,102.362 42.418,102.362 42.418,105.029 43.053,105.029
  region net DC_IN: 41.402,110.236 42.545,110.236 42.672,110.109 42.672,107.696 32.766,107.061 32.131,110.109 32.131,110.236 32.258,110.363
  region net DC_IN: 32.893,105.537 35.814,105.537 35.814,114.554 35.433,114.935 35.433,117.475 32.766,117.475 32.004,116.713 32.004,107.061
  region net GND: 32.248,122.809 49.022,122.809 49.022,116.586 38.227,116.586 34.544,120.269 32.004,120.269 30.712,121.561
  region net GND: 34.269,123.063 31.168,123.063 27.559,118.491 26.797,106.045 29.464,106.045 29.464,108.204 30.35,115.105

## Silkscreen, mask and mechanical layers (free items; w line width, h text height)
Top Overlay:
  text "BKRES" at 147.193,118.618 h1.52
  text "RX2" at 88.392,112.632 h1.52
  text "TX2" at 88.392,110.092 h1.52
  text "GND" at 88.392,107.696 h1.52
  text "SDA" at 88.646,100.965 h1.52
  text "5V" at 75.311,99.568 h1.52
  text "SCL" at 88.519,98.552 h1.52
  text "3.3V" at 73.787,96.901 h1.52
  text "5V" at 88.773,95.885 h1.52
  text "GND" at 73.787,94.488 h1.52
  text "GND" at 88.646,93.345 h1.52
  text "SCL" at 80.518,75.946 h1.52
  text "SDA" at 80.518,73.533 h1.52
  text "5V" at 80.518,70.866 h1.52
  text "GND" at 80.518,68.834 h1.52
  text "GND" at 88.519,64.643 h1.52
  text "GND" at 143.51,64.643 h1.52
  text "GND" at 116.84,63.754 h1.52
Mechanical 1:
  the board outline again, w1.2